# Altium PCB F407ZGT6.PcbDoc (part 7 of 7)
Units mil, origin at the board's own origin, x right, y up, seen from the top; angles counter-clockwise.
Board outline 4380 x 3940 mil, 2 copper layers (Top Layer, Bottom Layer); 88 components, 146 nets, 552 pads, 268 vias.
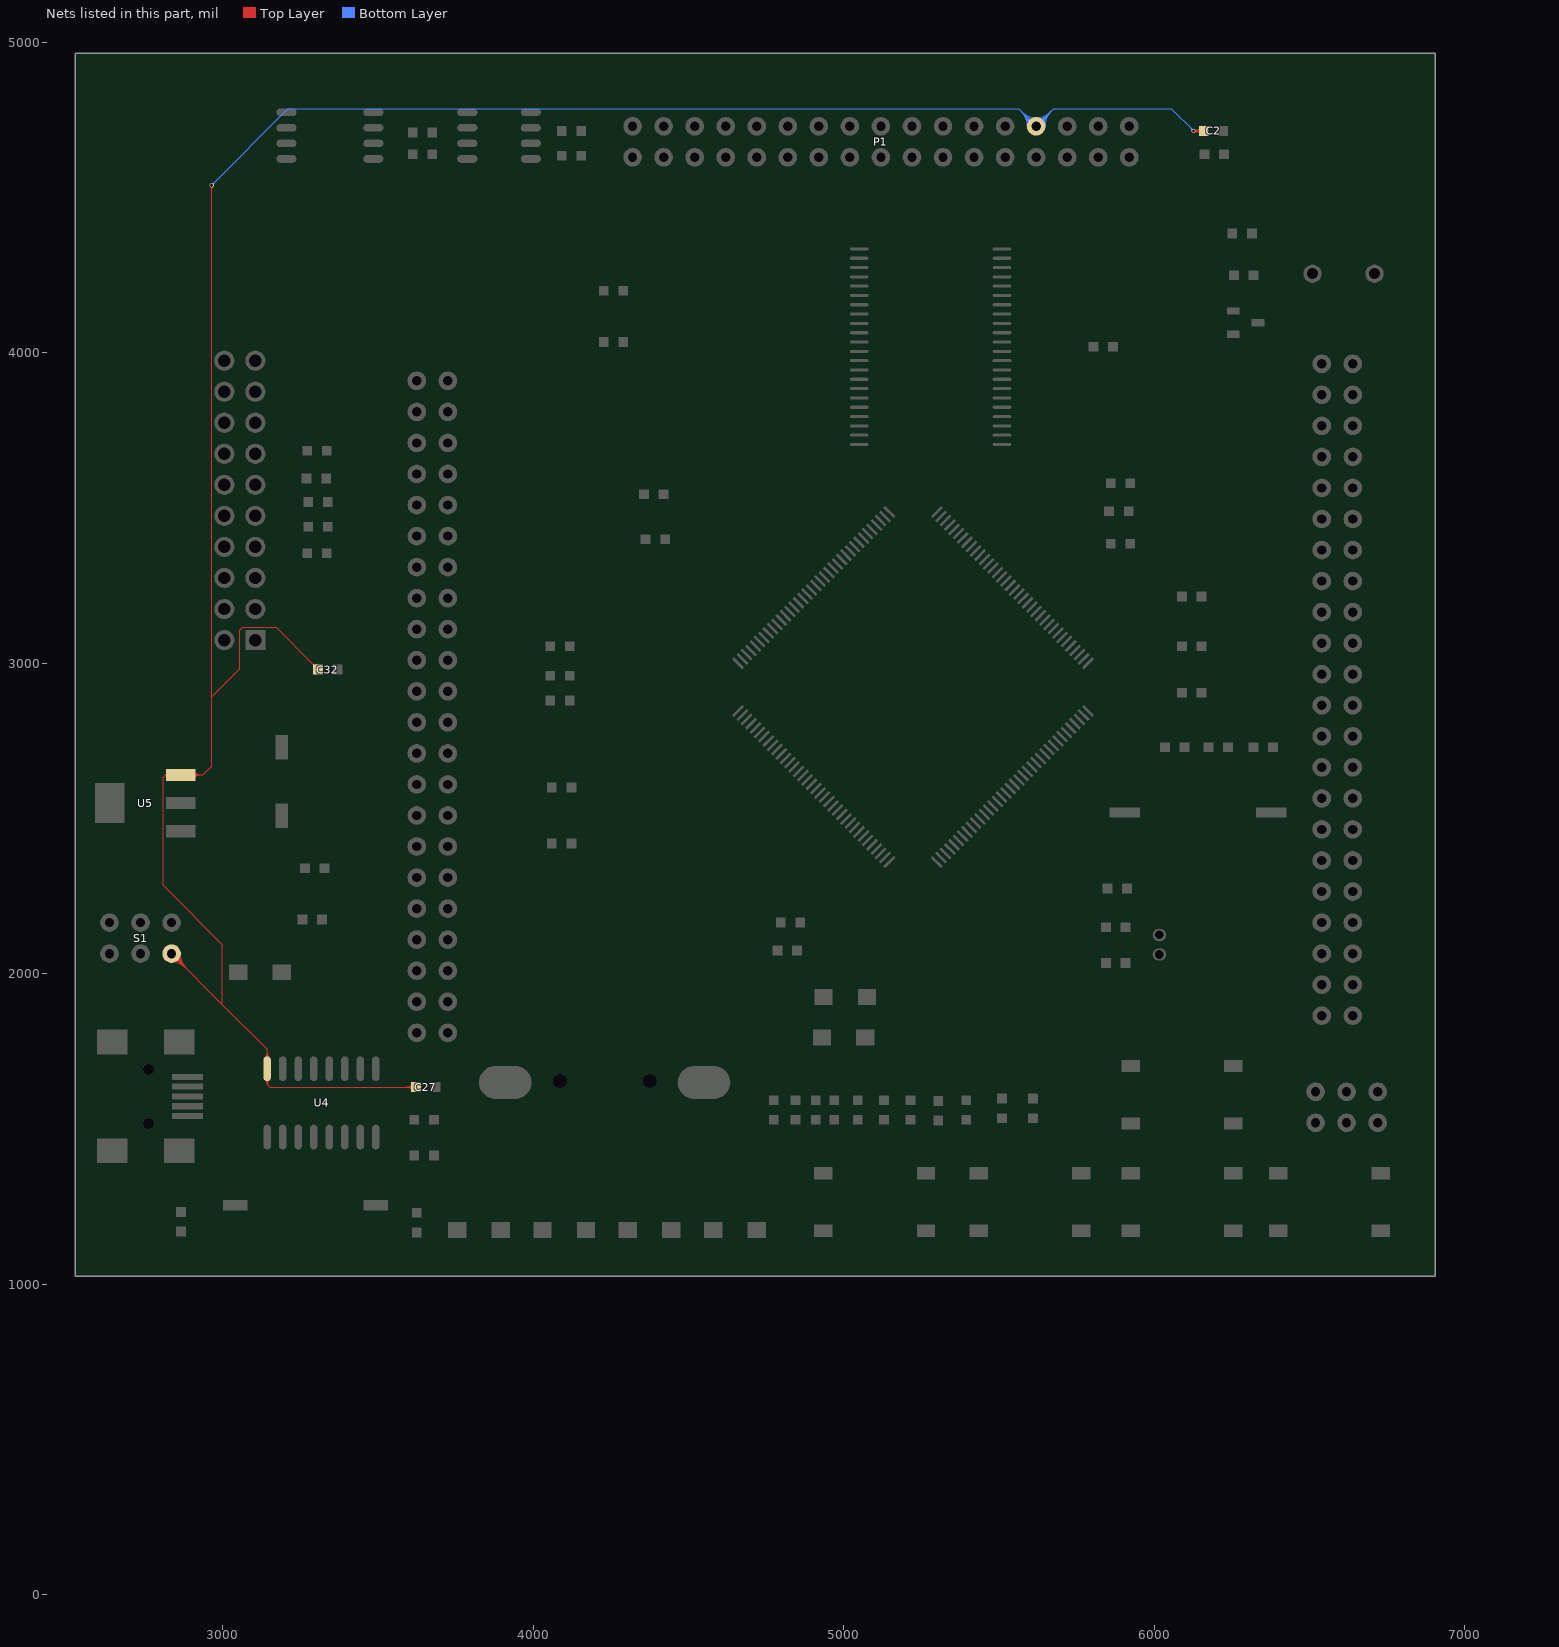
[diagram p7: the nets of this part, all layers, seen from the top]

## Via types
v1: diameter 14, hole 10, Top Layer to Bottom Layer, 265 vias
v2: diameter 150, hole 150, Top Layer to Bottom Layer, 3 vias

## Nets (pads, with @x,y where several pads share a name; then routed paths per layer and width w, separated by ;. In a path a pad name is that pad's centre, name@x,y a point inside that pad or via, vN(x,y) a via of type N, cw(c..) or ccw(c..) an arc to the next point about the centre after c; other vN are vias at no path point) (continued)
VCC5: C2.1 C27.2 C32.2 P1.28 S1.3 U4.16 U5.3 | length 9415.2
  Top Layer w4: U5.3@2819.14,2637.86 ccw(c2816,2637.38) 2816,2640.55 ; U5.3@2819.14,2643.24 cw(c2816,2643.72) 2816,2640.55 ; S1.3@2835,2037 cw(c2835,1969.4) 2882.8,2017.2 cw(c2930.6,2065) S1.3@2863,2065 ; S1.3@2835,2041 cw(c2835,1983.06) 2875.97,2024.03 cw(c2916.94,2065) S1.3@2859,2065 ; S1.3@2835,2045 cw(c2835,1996.72) 2869.14,2030.86 cw(c2903.28,2065) S1.3@2855,2065 ; S1.3@2835,2049 cw(c2835,2010.37) 2862.31,2037.69 cw(c2889.63,2065) S1.3@2851,2065 ; S1.3@2835,2065 2999,1901 ; U5.3@2898.58,2633.7 cw(c2915.11,2617.17) 2915.11,2640.55 cw(c2915.11,2663.93) U5.3@2898.58,2647.4 ; U5.3@2901.41,2630.88 cw(c2924.77,2607.51) 2924.77,2640.55 cw(c2924.77,2673.59) U5.3@2901.41,2650.23 ; U5.3@2904.24,2628.05 cw(c2934.43,2597.86) 2934.43,2640.55 cw(c2934.43,2683.25) U5.3@2904.24,2653.06 ; v1@2960.46,4536.46 cw(c2951.93,4527.93) 2964,4527.93 cw(c2976.07,4527.93) v1@2967.54,4536.46 ; v1(2964,4540) 2964,2892 ; U4.16@3135.93,1729.07 ccw(c3118.86,1746.14) 3143,1746.14 ccw(c3167.14,1746.14) U4.16@3150.07,1729.07 ; U4.16@3136.42,1658.47 cw(c3123.8,1644) 3143,1644 ; U4.16@3138.76,1726.24 ccw(c3128.51,1736.49) 3143,1736.49 ccw(c3157.49,1736.49) U4.16@3147.24,1726.24 ; U4.16@3139.05,1661.48 cw(c3131.48,1652.8) 3143,1652.8 cw(c3154.52,1652.8) U4.16@3146.95,1661.48 ; U4.16@3149.58,1658.47 ccw(c3162.2,1644) 3143,1644 ; C32.2@3303.62,2993.32 ccw(c3302.51,2997.68) 3307.01,2997.68 ; C32.2@3307.01,2980 3307.01,2997.68 ; C32.2@3310.39,2993.32 cw(c3311.5,2997.68) 3307.01,2997.68 ; C27.2@3612.29,1625.28 ccw(c3588.82,1601.81) 3588.82,1635 ccw(c3588.82,1668.19) C27.2@3612.29,1644.72 ; C27.2@3615.12,1628.11 ccw(c3598.47,1611.47) 3598.47,1635 ccw(c3598.47,1658.53) C27.2@3615.12,1641.89 ; C27.2@3622.01,1635 3152,1635 3143,1644 ; v1@6129.5,4710.67 cw(c6135.54,4700.21) 6138.66,4711.88 cw(c6141.78,4723.53) v1@6131.33,4717.5 ; v1@6129.5,4719.33 ccw(c6135.54,4729.79) 6138.66,4718.12 ccw(c6141.78,4706.47) v1@6131.33,4712.5 ; v1@6130.54,4711.46 cw(c6139.07,4702.93) 6139.07,4715 cw(c6139.07,4727.07) v1@6130.54,4718.54 ; C2.1@6150.24,4705.32 ccw(c6127,4682.27) v1(6127,4715) ; C2.1@6150.24,4724.68 cw(c6127,4747.73) v1(6127,4715) ; C2.1@6153.08,4708.14 ccw(c6136.6,4691.79) 6136.6,4715 ccw(c6136.6,4738.21) C2.1@6153.08,4721.86 ; C2.1@6160,4715 v1(6127,4715) ; 2816,2640.55 U5.3@2864.17,2640.55 2936,2640.55 2964,2668.55 2964,2892 ; 2816,2640.55 2808,2632.55 2808,2285 2999,2094 2999,1901 ; 2964,2892 3055,2983 3055,3107 3064,3116 3171.57,3116 3289.89,2997.68 3307.01,2997.68 ; 2999,1901 3143,1757 U4.16@3143,1694 3143,1644
  Bottom Layer w4: v1(2964,4540) 3210,4786 5564,4786 P1.28@5620,4730 5676,4786 6056,4786 v1(6127,4715) ; v1@2964,4545 ccw(c2964,4557.07) 2972.54,4548.54 ccw(c2981.07,4540) v1@2969,4540 ; P1.28@5592,4730 ccw(c5524.4,4730) 5572.2,4777.8 ccw(c5620,4825.6) 5620,4758 ccw(c5620,4825.6) 5667.8,4777.8 ccw(c5715.6,4730) P1.28@5648,4730 ; P1.28@5596,4730 ccw(c5538.06,4730) 5579.03,4770.97 ccw(c5620,4811.94) 5620,4754 ccw(c5620,4811.94) 5660.97,4770.97 ccw(c5701.94,4730) P1.28@5644,4730 ; P1.28@5600,4730 ccw(c5551.72,4730) 5585.86,4764.14 ccw(c5620,4798.28) 5620,4750 ccw(c5620,4798.28) 5654.14,4764.14 ccw(c5688.28,4730) P1.28@5640,4730 ; P1.28@5604,4730 ccw(c5565.37,4730) 5592.69,4757.31 ccw(c5620,4784.63) 5620,4746 ccw(c5620,4784.63) 5647.31,4757.31 ccw(c5674.63,4730) P1.28@5636,4730 ; v1@6122,4715 ccw(c6109.93,4715) 6118.46,4723.54 ccw(c6127,4732.07) v1@6127,4720
pads on no net: BT1.0 BT1.0/2 K1.3 K2.2 K2.4 K3.1 K3.3 K4.1 K4.3 K5.1 K5.3 P1.32 P4.11 P4.17 P4.19 P6.4 P6.10 P6.11 S1.1 S1.4 S1.5 S1.6 U4.9 U4.10 U4.11 U4.12 U4.13 U4.14 U5.4
copper on no net: | length 16685
  Top Layer w10: 7145,0 7190,0 ; 2525,1025 6905,1025 6905,4965 2525,4965 2525,1025
  other v2: 2697,1196 2694,4778 6733,4806

## Polygon pours and split planes (outlines as drawn)
no net on Bottom Layer "Bottom Layer-No Net" (solid, pour order 6): 2533,4961 6904,4961 6918,4975 6897,4954 6897,1031 2540,1031 2533,1024 2540,1031 2540,4982
no net on Top Layer "Bottom Layer-No Net" (solid, pour order 4): 2525,4965 6905,4965 6905,1025 2535,1025 2527,1017 2525,1019 2525,4965

## Text inside footprints (layer, text, board x,y; h text height)
C34: Top Overlay "C3" at 3078.7,2827.61 h25
P4: Top Overlay "J4" at 2510,2925 h25 r270
U1: Top Overlay "STM32F407ZGT6" at 5681.84,2854.97 h60 r135; Top Overlay "STM32F407ZGT6" at 5300,2473.14 h60 r135
U2: Top Overlay "U3" at 3159.96,4876.31 h25
U5: Top Overlay "UP1" at 2922.24,2348.3 h25 r180